# Altium PCB LM-CT-001.PcbDoc
Units mm, origin at the board's own origin, x right, y up, seen from the top; angles counter-clockwise.
Board outline 15 x 52.8 mm, 5 copper layers (Top Layer, Guard, Signal Layer 1, GND, Bottom Layer), stack 0.941 mm thick; 72 components, 73 nets, 279 pads, 38 vias.
Unrouted connection lines stored in the file: 122.
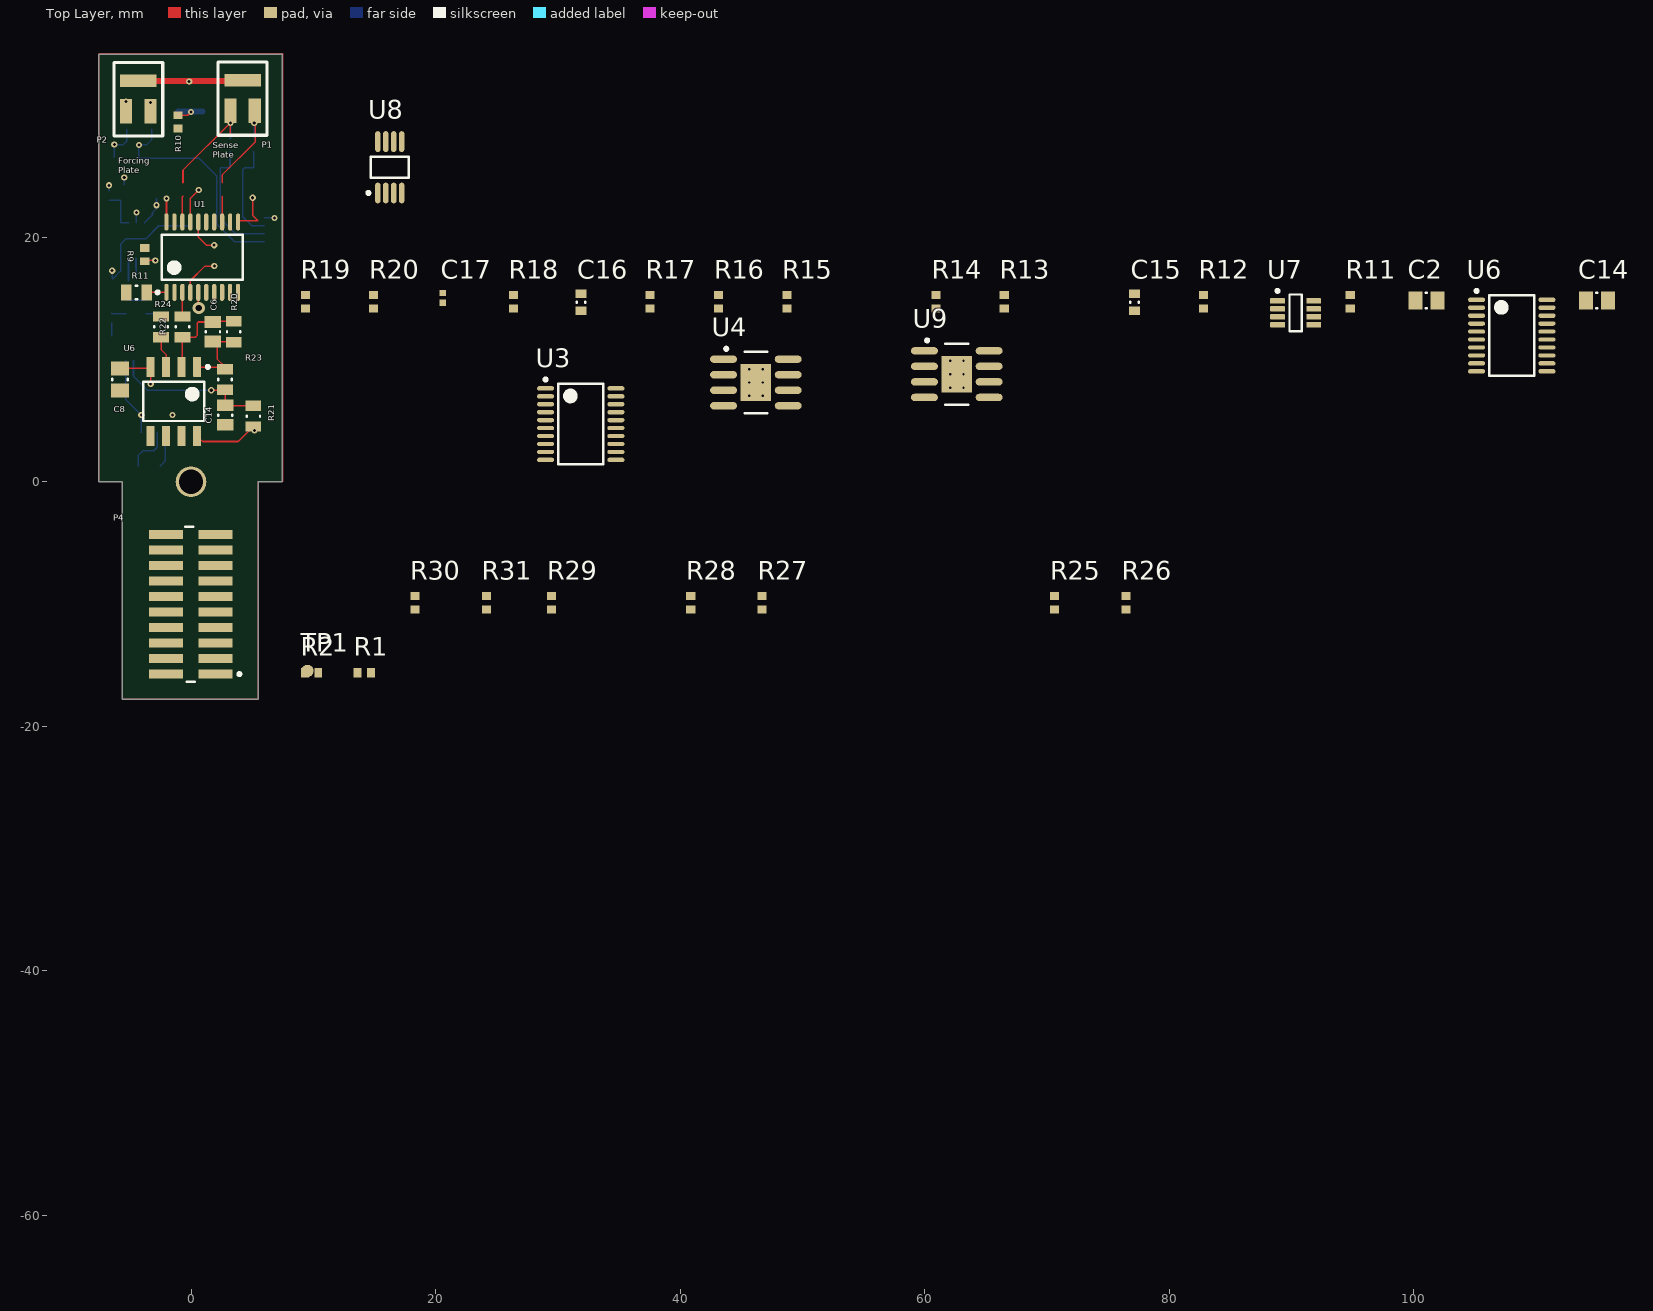
[diagram p0: Top Layer view]
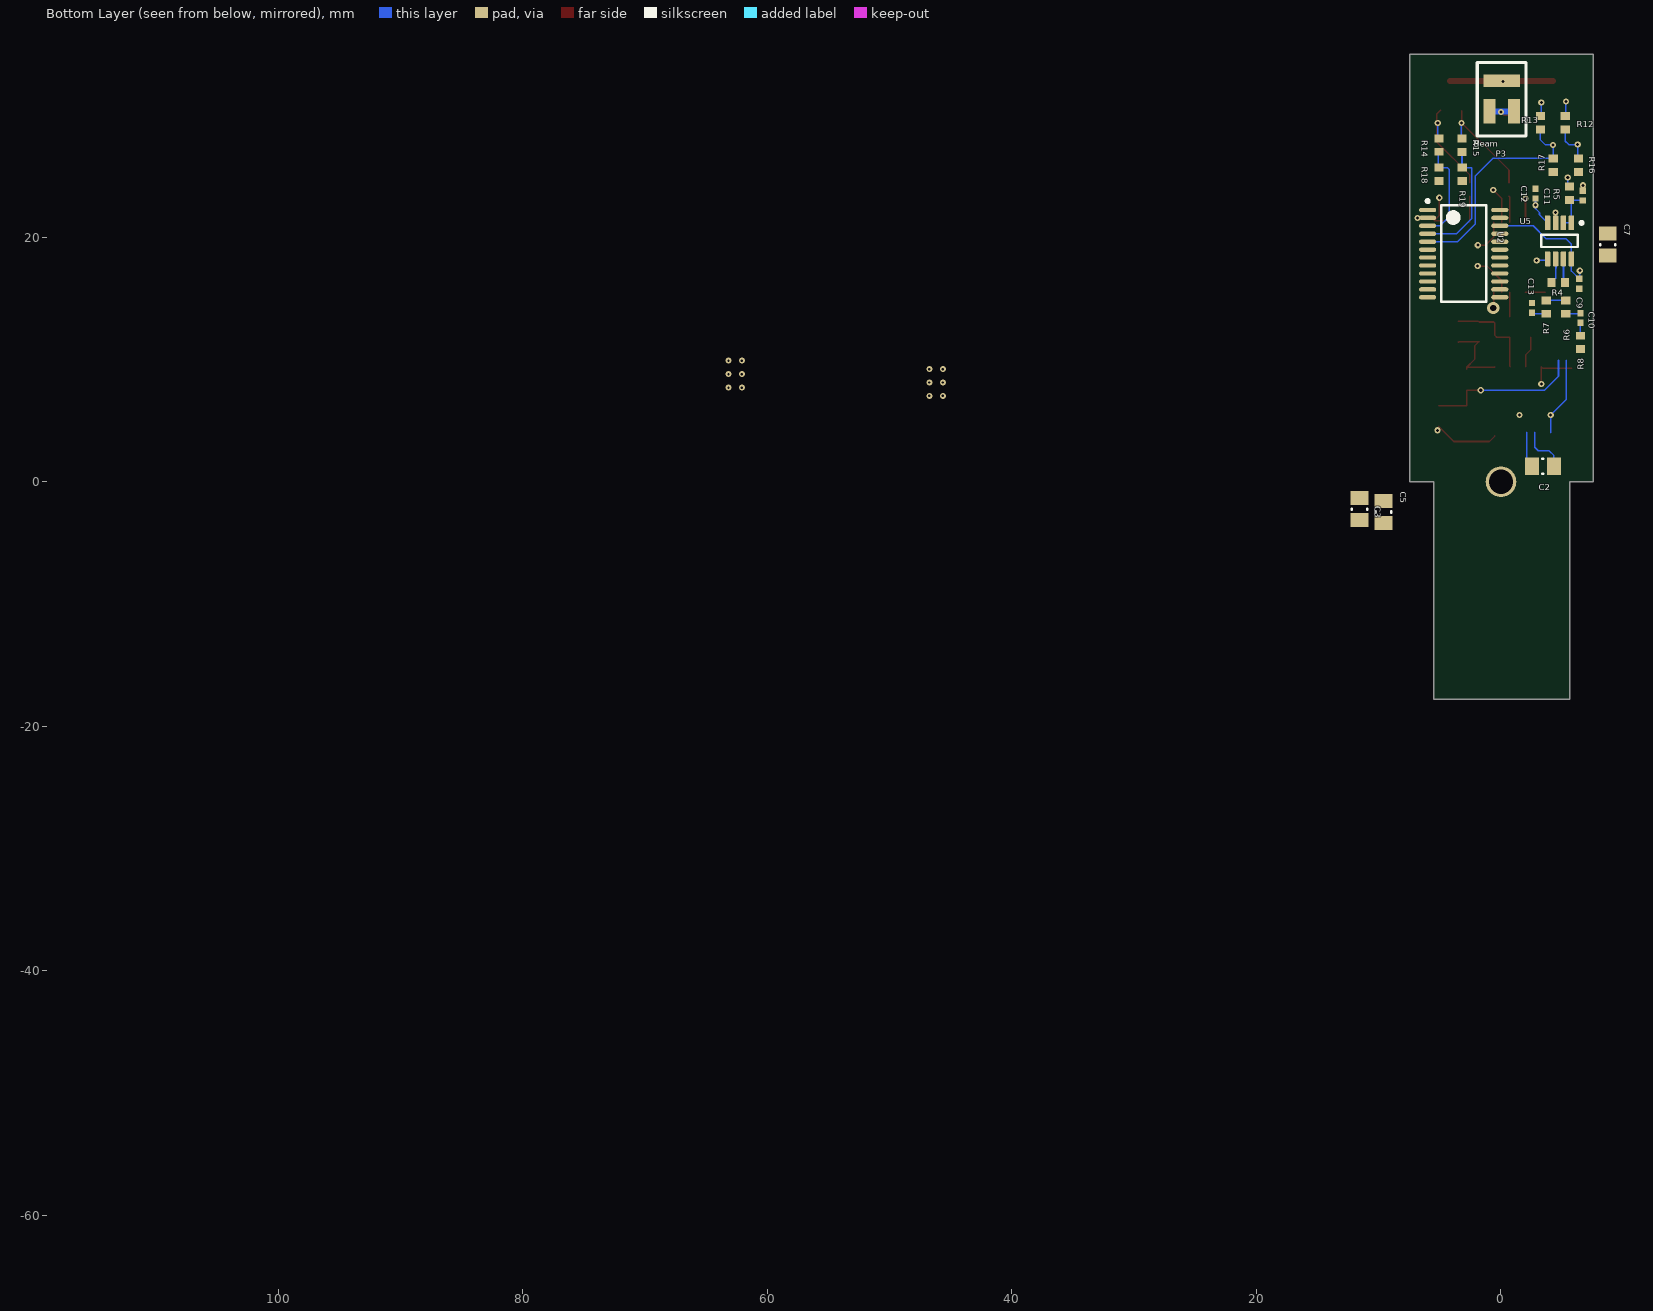
[diagram p1: Bottom Layer view, seen from below]
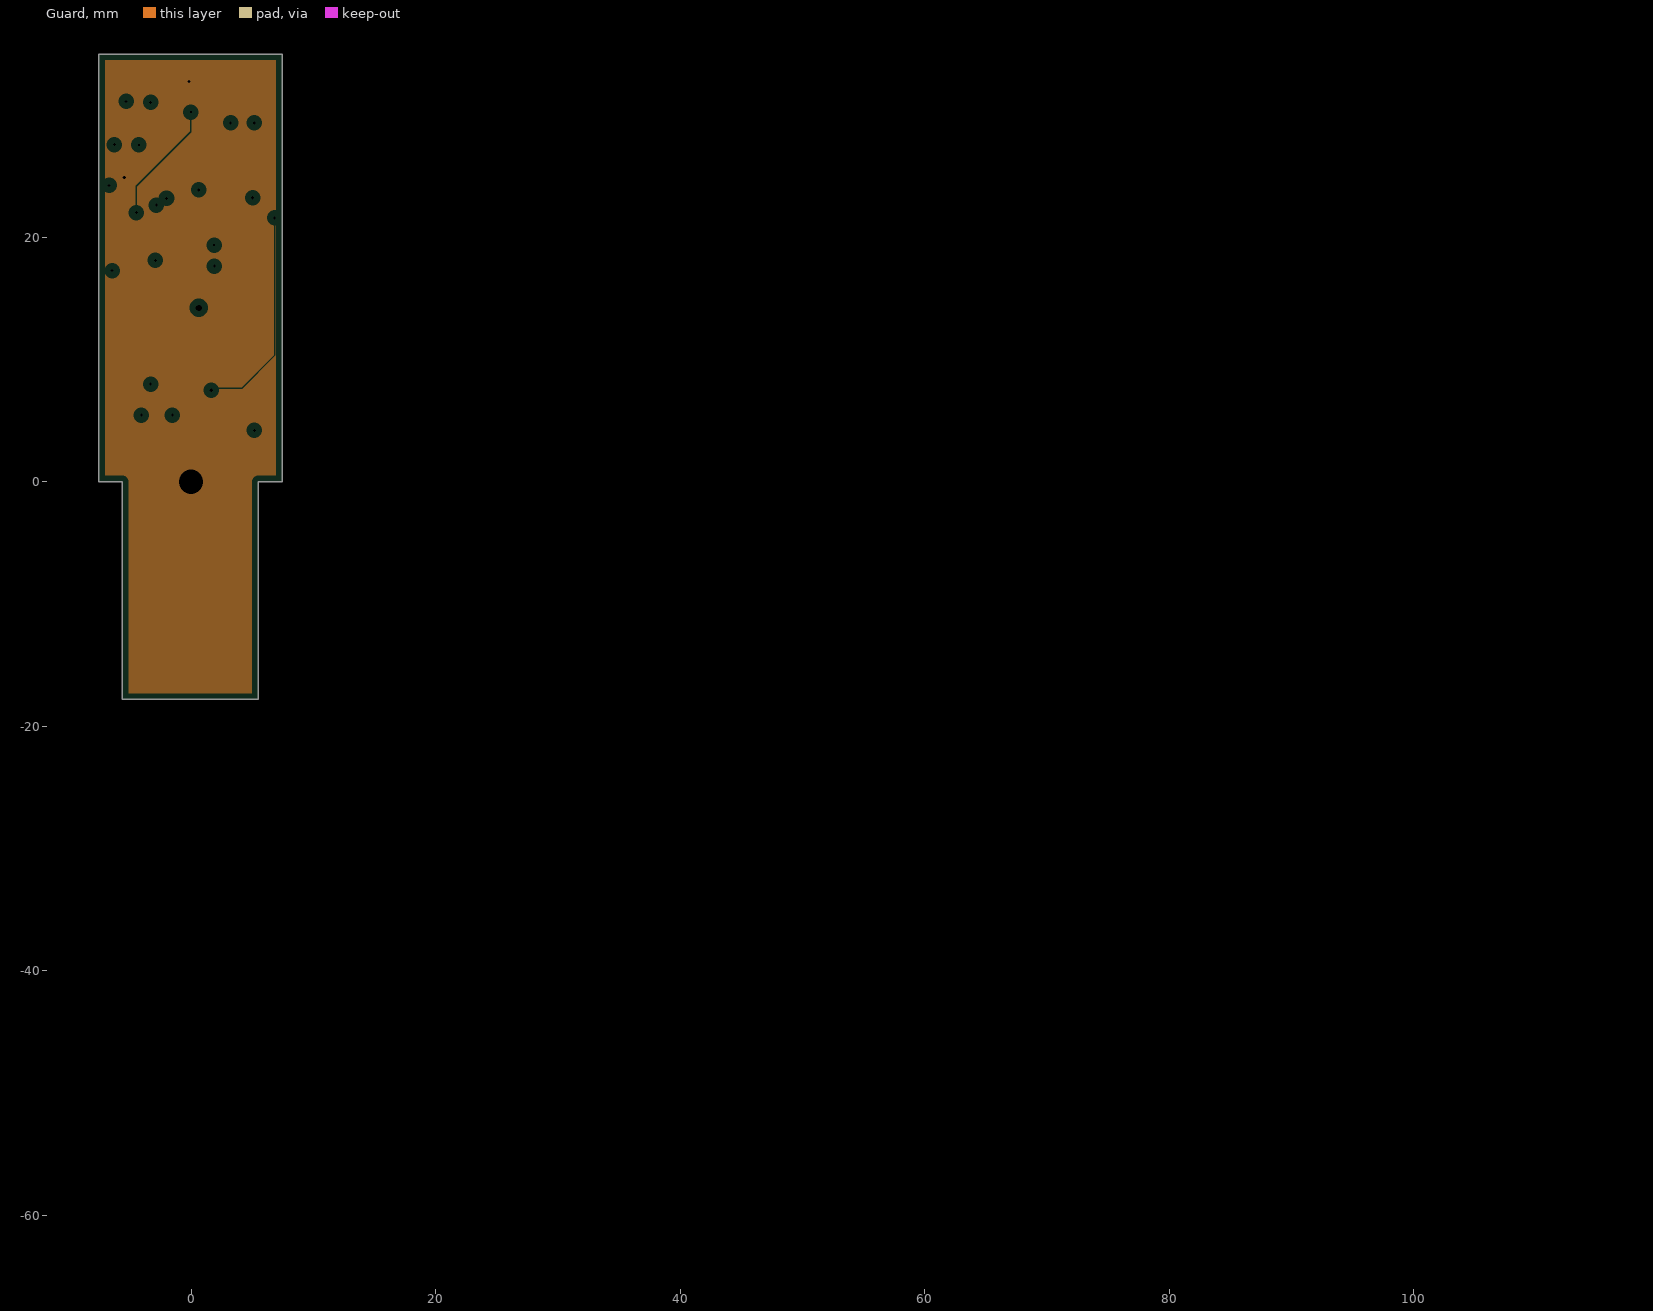
[diagram p2: Guard, clearances drawn from the general rule]
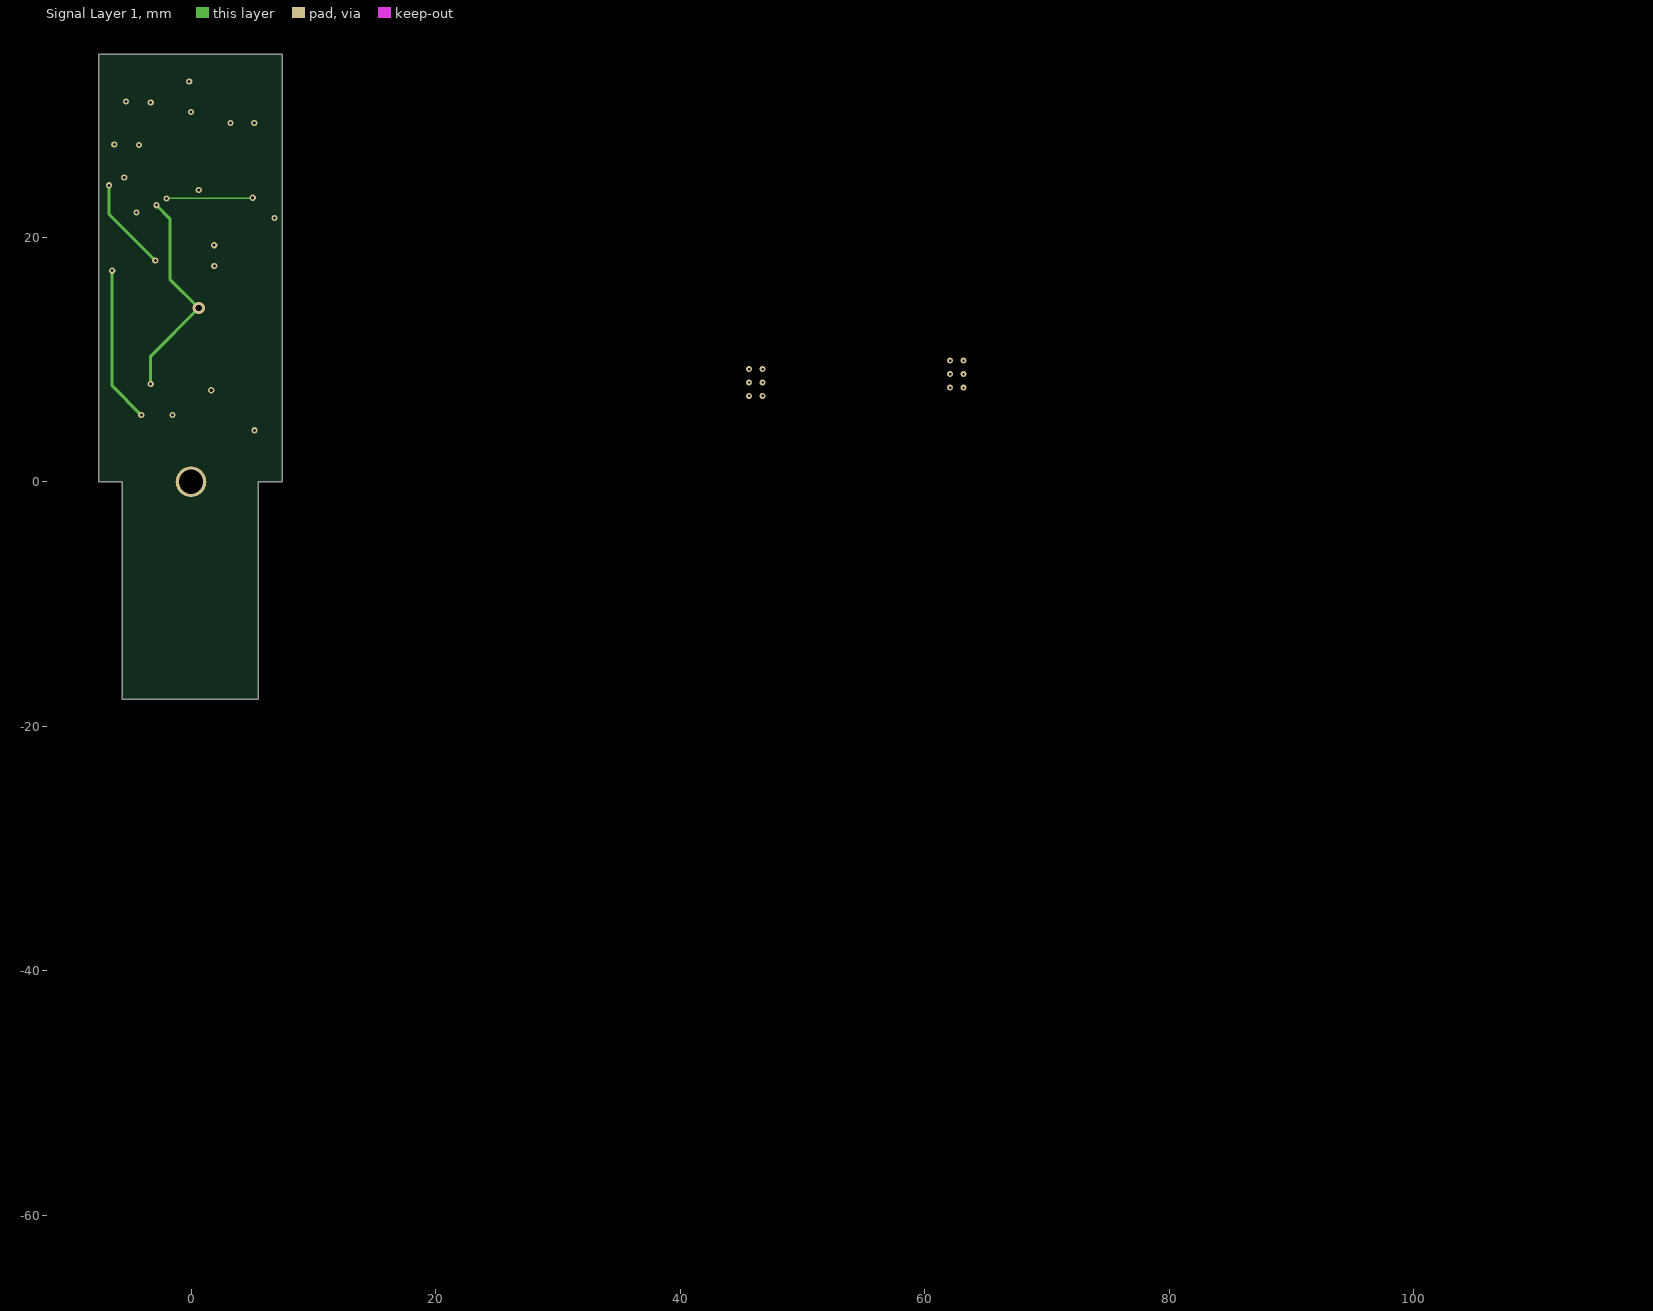
[diagram p3: Signal Layer 1]
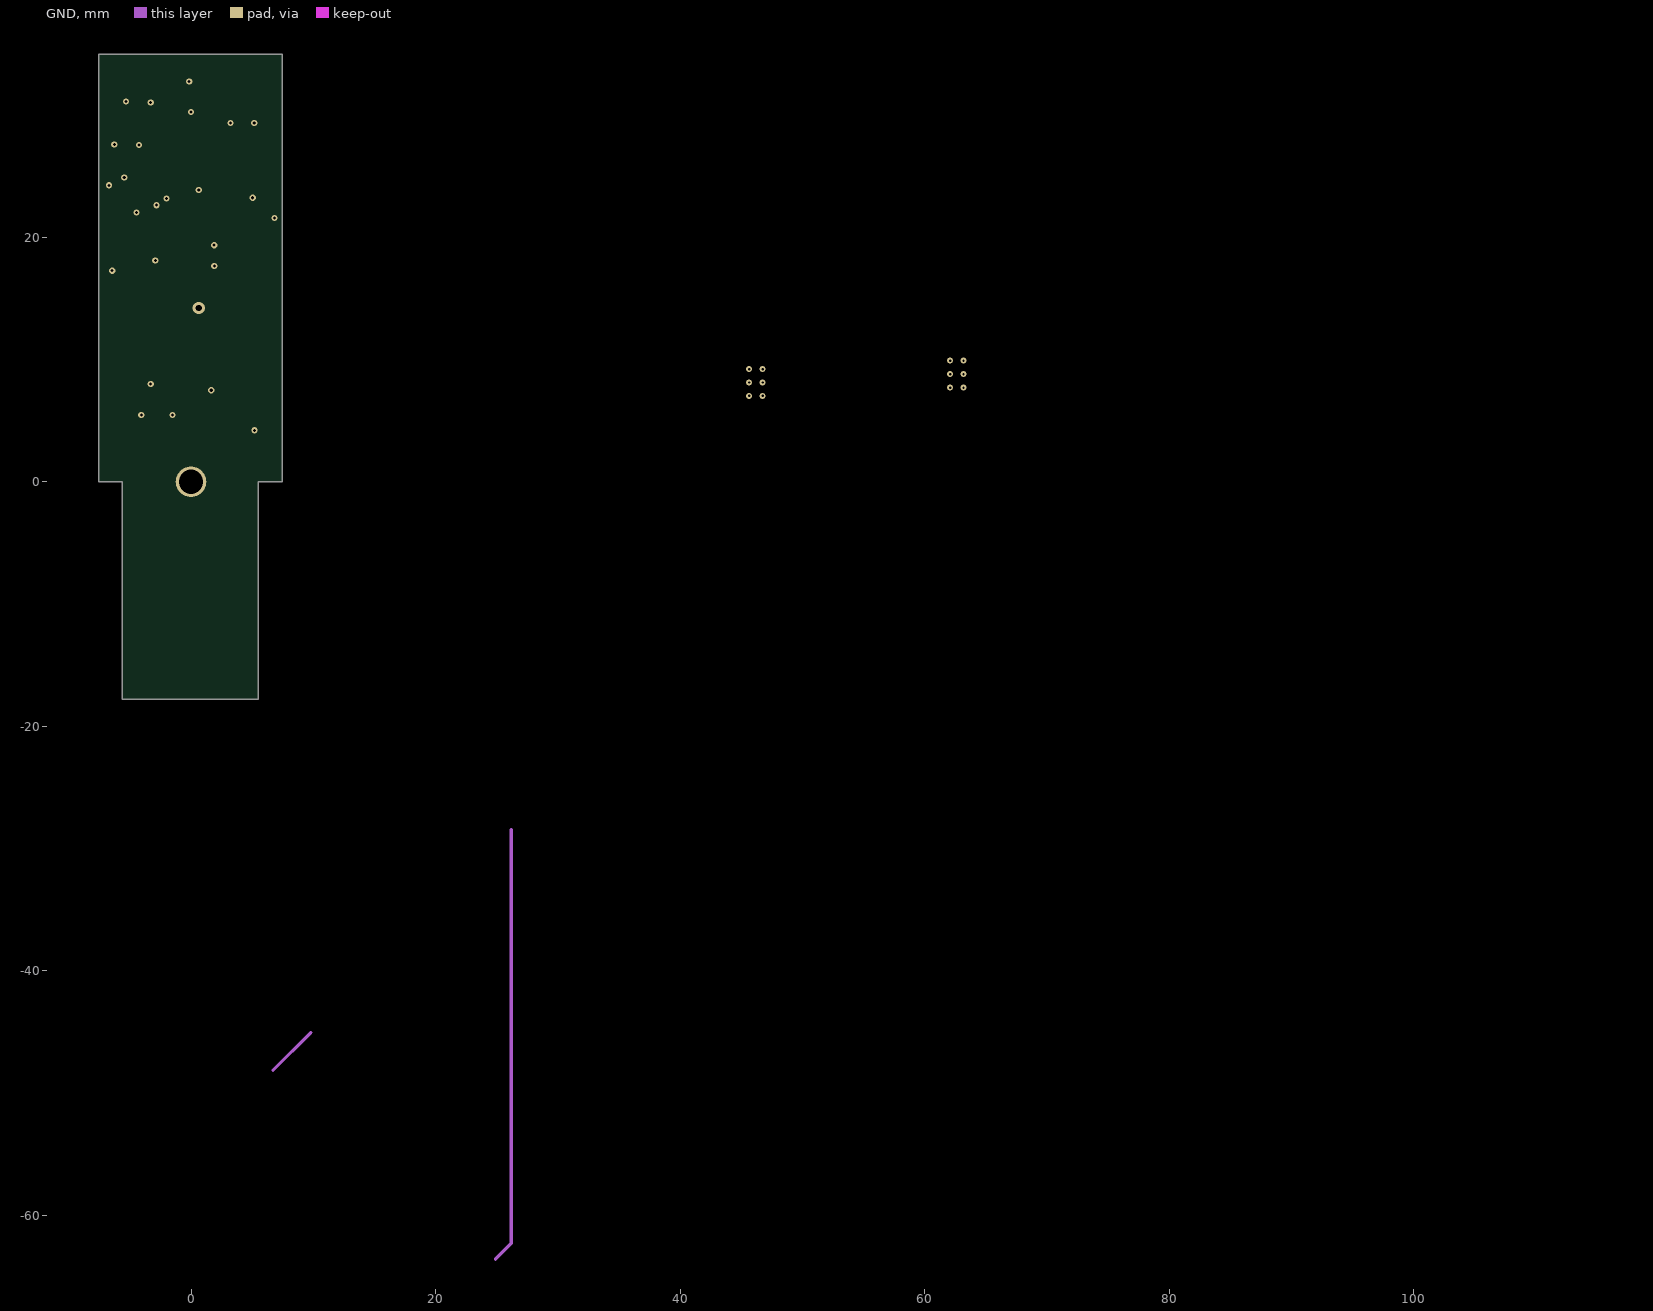
[diagram p4: GND]

## Layer stack, top to bottom
Top Solder: solder mask 0.0102, Solder Resist, Dk 3.5
Top Layer: signal copper 0.0356
Dielectric 1: core 0.254, FR-4, Dk 4.2
Guard: plane copper 0.036, net Guard
Dielectric 4: prepreg 0.127, Dk 4.2
Signal Layer 1: signal copper 0.036
Dielectric 3: core 0.254, Dk 4.2
GND: signal copper 0.036
Dielectric 2: prepreg 0.127, Dk 4.2
Bottom Layer: signal copper 0.0356
Bottom Solder: solder mask 0.0102, Solder Resist, Dk 3.5

## Board outline
7.444,0.001 5.494,0.001 5.494,-17.8 -5.606,-17.8 -5.606,0.001 -7.556,0.001 -7.556,34.996 7.444,34.996

## Design rules (kind name [scope] priority, off if disabled: settings)
Clearance [All] p1: gap=0.127 ignorepadtopadclearanceinfootprint=FALSE except(0: Arc-Hole Track-Hole SMDPad-Hole THPad-Hole Via-Hole Fill-Hole Poly-Hole Region-Hole Text-Hole)
HoleToHoleClearance [All] p1: gap=0.127 allowstackedmicrovias=TRUE
MinimumSolderMaskSliver [All] p1: minsoldermaskwidth=0.127
PlaneClearance [All] p1: clearance=0.508
PlaneConnect [All] p1: planeconnectstyle=Relief reliefexpansion=0.508 reliefentries=4 reliefconductorwidth=0.254 reliefairgap=0.254
PolygonConnect [All] p1: connectstyle=Relief reliefconductorwidth=0.254 reliefentries=4 polygonreliefangle="90 Angle" airgapwidth=0.254
RoutingVias [All] p1: holewidth=0.254 width=0.508 viastyle="Through Hole" minholewidth=0.127 minwidth=0.254 maxholewidth=0.711 maxwidth=1.27
SilkToSolderMaskClearance [IsPad] p1: minsilkscreentomaskgap=0.127 clearancetoexposedcopper=TRUE
SolderMaskExpansion [All] p1: expansion=0.102
Width [All] p1: maxlimit=0.5 minlimit=0.127 preferedwidth=0.254 toplayer_prefwidth=0.127 midlayer2_maxwidth=0.254 bottomlayer_prefwidth=0.127 minimp=50.000000 maximp=50.000000 favimp=50.000000
25 further rules are at their usual default settings.

## Classes and differential pairs
component class Sense: C2 C14 C15 C16 C17 P2 R1 R2 R11 R12 R13 R14 R15 R16 R17 R18 R19 R20 U6 U7 U8
component class Force: P1 R25 R26 R27 R28 R29 R30 R31 U3 U4 U9
component class Beam_Amp: C9 C10 C11 C12 C13 P3 P4 R4 R5 R6 R7 R8 R9 R10 R11 TP1 U1 U5
component class ADC: C2 C3 C5 R12 R13 R14 R15 R16 R17 R18 R19 U2
component class Synch_Demod: C6 C7 C8 C14 R20 R21 R22 R23 R24 U6

## Components (designator, comment, footprint, x,y, rotation, side; value= is the part's Value field where it differs from the comment)
C2 "CAP CER 0.1UF 25V X7R 0805" CAPC0805(2012)145_N 101.045,14.839 r0 top
C2 "CAP CER 0.1UF 25V X7R 0805" CAPC0805(2012)145_N -3.429,1.27 r180 bottom
C3 "CAP CER 0.1UF 25V X7R 0805" CAPC0805(2012)145_N 11.582,-2.235 r270 bottom
C5 "CAP CER 0.1UF 25V X7R 0805" CAPC0805(2012)145_N 9.601,-2.464 r270 bottom
C6 "470nF" CAPC0805(2012)75_L 1.794,12.276 r270 top
C7 "CAP CER 0.1UF 25V X7R 0805" CAPC0805(2012)145_N -8.738,19.406 r270 bottom
C8 "CAP CER 0.1UF 25V X7R 0805" CAPC0805(2012)145_N -5.806,8.376 r270 top
C9 "0.1uF" CAPC0402(1005)60_L -6.4,16.2 r90 bottom
C10 "0.1uF" CAPC0402(1005)60_L -6.5,13.4 r270 bottom
C11 "0.1uF" CAPC0402(1005)60_L -6.68,23.419 r90 bottom
C12 "0.1uF" CAPC0402(1005)60_L -2.825,23.575 r270 bottom
C13 "1uF" CAPC0402(1005)60_L -2.54,14.224 r270 bottom
C14 "CAP CER 0.1UF 25V X7R 0805" CAPC0805(2012)145_N 114.99,14.839 r0 top
C14 "22uF" CAPC0805(2012)75_L 2.794,5.461 r90 top
C15 "1uF" CAPC0603(1608)100_L 77.169,14.686 r90 top
C16 "1uF" CAPC0603(1608)100_L 31.906,14.686 r90 top
C17 "0.1uF" CAPC0402(1005)60_L 20.578,15.042 r90 top
P1 "Triax_Conn" Triax_Conn 3.219,30.351 r0 top
P2 "Triax_Conn" Triax_Conn -5.309,30.302 r0 top
P3 "Triax_Conn" Triax_Conn 0.944,30.301 r180 bottom
P4 "FTSH-110-01-L-DV" SMTC-FTSH-110-01-L-DV_V -0.025,-10.008 r90 top
R1 "100" RESC0402(1005)_M 14.177,-15.616 r0 top
R2 "100" RESC0402(1005)_M 9.859,-15.616 r0 top
R4 "" RESC0402(1005)_M -4.7,16.3 r0 bottom
R5 "100" RESC0402(1005)_M -5.613,23.597 r90 bottom
R6 "" RESC0402(1005)_M -5.3,14.3 r90 bottom
R7 "" RESC0402(1005)_M -3.708,14.3 r270 bottom
R8 "" RESC0402(1005)_M -6.5,11.4 r270 bottom
R9 "" RESC0402(1005)_M -3.785,18.593 r90 top
R10 "2.2M" RESC0402(1005)_M -1.067,29.439 r90 top
R11 "3.9K" RESC0402(1005)_M 94.822,14.737 r90 top
R11 "0" RESC0805(2012)_L -4.456,15.501 r0 top
R12 "7.5K" RESC0402(1005)_M 82.808,14.737 r90 top
R12 "100K" RESC0402(1005)_M -5.258,29.388 r90 bottom
R13 "0" RESC0402(1005)_M 66.527,14.737 r90 top
R13 "100K" RESC0402(1005)_M -3.226,29.388 r90 bottom
R14 "DNP" RESC0402(1005)_M 60.939,14.737 r90 top
R14 "100K" RESC0402(1005)_M 5.075,27.55 r90 bottom
R15 "7.5K" RESC0402(1005)_M 48.747,14.737 r90 top
R15 "100K" RESC0402(1005)_M 3.189,27.534 r90 bottom
R16 "DNP" RESC0402(1005)_M 43.159,14.737 r90 top
R16 "10K" RESC0402(1005)_M -6.35,25.908 r90 bottom
R17 "3.9K" RESC0402(1005)_M 37.545,14.737 r90 top
R17 "10K" RESC0402(1005)_M -4.27,25.908 r90 bottom
R18 "0" RESC0402(1005)_M 26.369,14.737 r90 top
R18 "10K" RESC0402(1005)_M 5.075,25.146 r90 bottom
R19 "1M" RESC0402(1005)_M 9.351,14.737 r90 top
R19 "10K" RESC0402(1005)_M 3.172,25.146 r90 bottom
R20 "1M" RESC0402(1005)_M 14.939,14.737 r90 top
R20 "300K" RESC0805(2012)_L 3.494,12.276 r90 top
R21 "499K" RESC0805(2012)_L 5.094,5.376 r270 top
R22 "18.2K" RESC0805(2012)_L -0.706,12.676 r90 top
R23 "249K" RESC0805(2012)_L 2.794,8.376 r90 top
R24 "33K" RESC0805(2012)_L -2.45,12.675 r270 top
R25 "10k" RESC0402(1005)_M 70.641,-9.901 r90 top
R26 "100k" RESC0402(1005)_M 76.483,-9.901 r90 top
R27 "100k" RESC0402(1005)_M 46.715,-9.901 r90 top
R28 "100k" RESC0402(1005)_M 40.873,-9.901 r90 top
R29 "3.9K" RESC0402(1005)_M 29.493,-9.901 r90 top
R30 "10k" RESC0402(1005)_M 18.317,-9.901 r90 top
R31 "100k" RESC0402(1005)_M 24.159,-9.901 r90 top
TP1 "TP-SM-C-100" TP-SM-C-100 9.529,-15.463 r0 top
U1 "MAX333CWP+" TSOP65P640X90-20N 0.919,18.376 r90 top
U2 "MAX1300" MAX1300 3.048,18.669 r180 bottom
U3 "MAX333AEUP+" TSOP65P640X90-20N 31.877,4.724 r0 top
U4 "OPA454AIDDAG4" TI-DDA8-2745X2245TP_N 46.203,8.128 r0 top
U5 "OPA2378AIDCNT" DCN0008A_M -4.787,19.71 r270 bottom
U6 "MAX333CWP+" TSOP65P640X90-20N 108.03,11.969 r0 top
U6 "LPC662AIM" D0008A_M -1.406,6.576 r270 top
U7 "OPA2378AIDCNT" DCN0008A_M 90.352,13.823 r0 top
U8 "MCP4161-502E/MS" MSOP-MS8_N 16.256,25.73 r90 top
U9 "OPA454AIDDAG4" TI-DDA8-2745X2245TP_N 62.636,8.814 r0 top

## Footprints (in the part's own frame and the unit in brackets; to place one, negate y for a bottom-side part, rotate by r counter-clockwise, add the part's x,y. Pads: shape width x height; smd on the part's side, far side on the other; paste and mask are expansions set on the pad)
CAPC0402(1005)60_L [mm] "Chip Capacitor, Body 1.0x0.5mm, Height 0.6mm, IPC High Density"
  rect 0.52x0.52 smd: 1(-0.4,0) 2(0.4,0)
  body extent -0.55,-0.3 0.55,0.3, height 0.6
CAPC0603(1608)100_L [mm] "Chip Capacitor, Body 1.6x0.8mm, Height 1.0mm, IPC High Density"
  rect 0.7x0.9 smd: 1(-0.7,0) 2(0.7,0)
  silkscreen extent -0.05,-0.35 0.05,0.35, body extent -0.87,-0.47 0.88,0.48, height 1
CAPC0805(2012)75_L [mm] "Chip Capacitor, Body 2.0x1.2mm, Height 0.75mm, IPC High Density"
  rect 0.95x1.35 smd: 1(-0.8,0) 2(0.8,0)
  silkscreen extent -0.05,-0.58 0.05,0.58, body extent -1.1,-0.72 1.1,0.72, height 0.75
CAPC0805(2012)145_N [mm] "Chip Capacitor, Body 2.0x1.2mm, Height 1.45mm, IPC Medium Density"
  rect 1.15x1.45 smd: 1(-0.9,0) 2(0.9,0)
  silkscreen extent -0.05,-0.62 0.05,0.63, body extent -1.1,-0.72 1.1,0.73, height 1.45
D0008A_M [mm] "SOIC, 8-Leads, Body 5x4mm, Pitch 1.27mm, IPC Low Density"
  rrect15% 1.65x0.65 smd: 1(-2.825,1.905) 2(-2.825,0.635) 3(-2.825,-0.635) 4(-2.825,-1.905) 5(2.825,-1.905) 6(2.825,-0.635) 7(2.825,0.635) 8(2.825,1.905)
  silkscreen extent -2.95,-2.5 1.6,2.91, body extent -3,-2.45 3,2.45, height 1.63
DCN0008A_M [mm] "SOT23, 8-Leads, Body 3x1.75mm, Pitch 0.65mm, IPC Low Density"
  rrect22% 1.2x0.45 smd: 1(-1.475,0.975) 2(-1.475,0.325) 3(-1.475,-0.325) 4(-1.475,-0.975) 5(1.475,-0.975) 6(1.475,-0.325) 7(1.475,0.325) 8(1.475,0.975)
  silkscreen extent -1.6,-1.5 0.5,1.92, body extent -0.88,-1.5 0.87,1.5, height 1.45
MAX1300 [mm] "TSOP, 24-Leads, Body 7.80x4.40mm, Pitch 0.65mm, IPC Medium Density"
  oval 1.4x0.35 smd: 1(-2.95,3.575) 2(-2.95,2.925) 3(-2.95,2.275) 4(-2.95,1.625) 5(-2.95,0.975) 6(-2.95,0.325) 7(-2.95,-0.325) 8(-2.95,-0.975) 9(-2.95,-1.625) 10(-2.95,-2.275) 11(-2.95,-2.925) 12(-2.95,-3.575) 13(2.95,-3.575) 14(2.95,-2.925) 15(2.95,-2.275) 16(2.95,-1.625) 17(2.95,-0.975) 18(2.95,-0.325) 19(2.95,0.325) 20(2.95,0.975) 21(2.95,1.625) 22(2.95,2.275) 23(2.95,2.925) 24(2.95,3.575)
  silkscreen extent -3.08,-3.95 1.85,4.42, body extent -3.2,-3.95 3.2,3.95, height 1.1
MSOP-MS8_N [mm] "TSOP, 8-Leads, Body 3x3mm, Pitch 0.65mm, IPC Medium Density"
  oval 1.7x0.45 smd: 1(-2.1,0.975) 2(-2.1,0.325) 3(-2.1,-0.325) 4(-2.1,-0.975) 5(2.1,-0.975) 6(2.1,-0.325) 7(2.1,0.325) 8(2.1,0.975)
  silkscreen extent -2.22,-1.55 0.85,1.87, body extent -1.55,-1.55 1.55,1.55, height 1.1
RESC0402(1005)_M [mm] "Chip Resistor, Body 1.0x0.5mm, IPC Low Density"
  rect 0.65x0.75 smd: 1(-0.55,0) 2(0.55,0)
  body extent -0.52,-0.28 0.53,0.28, height 0.4
RESC0805(2012)_L [mm] "Chip Resistor, Body 2.0x1.3mm, IPC High Density"
  rect 0.85x1.3 smd: 1(-0.85,0) 2(0.85,0)
  silkscreen extent -0.05,-0.55 0.05,0.55, body extent -1.1,-0.67 1.1,0.68, height 0.7
SMTC-FTSH-110-01-L-DV_V [mm] "CONN, 20-Leads, Body 12.7x3.43mm, Pitch 1.27mm"
  rect 0.74x2.79 smd: 1(-5.715,-2.035) 2(-5.715,2.035) 3(-4.445,-2.035) 4(-4.445,2.035) 5(-3.175,-2.035) 6(-3.175,2.035) 7(-1.905,-2.035) 8(-1.905,2.035) 9(-0.635,-2.035) 10(-0.635,2.035) 11(0.635,-2.035) 12(0.635,2.035) 13(1.905,-2.035) 14(1.905,2.035) 15(3.175,-2.035) 16(3.175,2.035) 17(4.445,-2.035) 18(4.445,2.035) 19(5.715,-2.035) 20(5.715,2.035)
  silkscreen extent -6.35,-4.11 6.35,0.47, body extent -6.35,-2.92 6.35,2.92, height 5.97
TI-DDA8-2745X2245TP_N [mm] "SOP, 8-Leads, Body 4.9x3.9mm, Pitch 1.27mm, Thermal Pad 2.745x2.245mm, IPC Medium Density"
  oval 2.2x0.6 smd: 1(-2.645,1.905) 2(-2.645,0.635) 3(-2.645,-0.635) 4(-2.645,-1.905) 5(2.645,-1.905) 6(2.645,-0.635) 7(2.645,0.635) 8(2.645,1.905)
  rect 2.49x3 smd: 9(0,0)
  silkscreen extent -2.55,-2.5 0.93,2.88, body extent -2,-2.5 2,2.5, height 1.7
TP-SM-C-100 [mm] "Test Point, Surface Mounting, Circular, Pad Diameter 1mm"
  round 1 smd: 1(0,0)
Triax_Conn [mm] "Triaxial pads for Conning Tower"
  rect 1x2 smd: 1(0,0) 2(2,0)
  rect 3x1 smd: 3(1,2.5)
  silkscreen extent -1,-2 3,4
TSOP65P640X90-20N [mm] "TSOP, 20-Leads, Body 6.50x4.40mm, Pitch 0.65mm, IPC Medium Density"
  oval 1.4x0.35 smd: 1(-2.875,2.925) 2(-2.875,2.275) 3(-2.875,1.625) 4(-2.875,0.975) 5(-2.875,0.325) 6(-2.875,-0.325) 7(-2.875,-0.975) 8(-2.875,-1.625) 9(-2.875,-2.275) 10(-2.875,-2.925) 11(2.875,-2.925) 12(2.875,-2.275) 13(2.875,-1.625) 14(2.875,-0.975) 15(2.875,-0.325) 16(2.875,0.325) 17(2.875,0.975) 18(2.875,1.625) 19(2.875,2.275) 20(2.875,2.925)
  silkscreen extent -3,-3.3 1.85,3.77, body extent -2.25,-3.3 2.25,3.3, height 0.9

## Part data
C2 C3 C5 C7 C8 C14: library part CMP-1036-04795-1, Capacitance=0.1µF, Manufacturer="Murata Electronics North America", Manufacturer Part Number=GRM21BR71E104KA01L, Operating Temperature="-55°C ~ 125°C", Package / Case="0805 (2012 Metric)", Ratings=-, Supplier Part Number 1=490-1673-6-ND, Temperature Coefficient=X7R, Tolerance=±10%, Voltage - Rated=25V, Applications="General Purpose", Category=Capacitors, ComponentLink1Description=http://www.murata.com/~/media/webrenewal/support/library/catalog/products/capacitor/mlcc/c02e.ashx, ComponentLink1URL=http://www.murata.com/~/media/webrenewal/support/library/catalog/products/capacitor/mlcc/c02e.ashx, Features=-, Height - Seated (Max)=-, Lead Spacing=-, Lead Style=-, Mounting Type="Surface Mount, MLCC", Packaging=Digi-Reel®, Part Status=Active, Pricing 1="1=0.2, 10=0.145, 100=0.0683, 500=0.04788, 1000=0.03964 (USD)", RoHS="RoHS Compliant", Size / Dimension="0.079\" L x 0.049\" W (2.00mm x 1.25mm)", Stock 1=891652, Supplier 1=Digi-Key, Thickness (Max)="0.053\" (1.35mm)"
C2: library part CMP-1036-04795-1, Capacitance=1µF, Manufacturer="Murata Electronics North America", Manufacturer Part Number=GRM21BR71E104KA01L, Operating Temperature="-55°C ~ 125°C", Package / Case="0805 (2012 Metric)", Ratings=-, Supplier Part Number 1=490-1673-6-ND, Temperature Coefficient=X7R, Tolerance=±10%, Voltage - Rated=25V, Applications="General Purpose", Category=Capacitors, ComponentLink1Description=http://www.murata.com/~/media/webrenewal/support/library/catalog/products/capacitor/mlcc/c02e.ashx, ComponentLink1URL=http://www.murata.com/~/media/webrenewal/support/library/catalog/products/capacitor/mlcc/c02e.ashx, Features=-, Height - Seated (Max)=-, Lead Spacing=-, Lead Style=-, Mounting Type="Surface Mount, MLCC", Packaging=Digi-Reel®, Part Status=Active, Pricing 1="1=0.2, 10=0.145, 100=0.0683, 500=0.04788, 1000=0.03964 (USD)", RoHS="RoHS Compliant", Size / Dimension="0.079\" L x 0.049\" W (2.00mm x 1.25mm)", Stock 1=891652, Supplier 1=Digi-Key, Thickness (Max)="0.053\" (1.35mm)"
C6: library part CMP-1036-02117-1, "CAP CER 0.47UF 25V X7R 0805", Manufacturer="Murata Electronics North America", Manufacturer Part Number=GRM219R71E474KA88D, Operating Temperature="-55°C ~ 125°C", Package / Case="0805 (2012 Metric)", Ratings=-, Supplier Part Number 1=490-11584-1-ND, Temperature Coefficient=X7R, Tolerance=±10%, Voltage - Rated=25V, Applications="General Purpose", Category=Capacitors, ComponentLink1Description=https://www.murata.com/~/media/webrenewal/support/library/catalog/products/capacitor/mlcc/c02e.ashx?la=en-us, ComponentLink1URL=https://www.murata.com/~/media/webrenewal/support/library/catalog/products/capacitor/mlcc/c02e.ashx?la=en-us, Features=-, Height - Seated (Max)=-, Lead Spacing=-, Lead Style=-, Mounting Type="Surface Mount, MLCC", Packaging="Cut Tape (CT)", Part Status=Active, Pricing 1="1=0.38, 10=0.262, 100=0.1573, 500=0.118, 1000=0.09964 (USD)", RoHS="RoHS Compliant", Size / Dimension="0.079\" L x 0.049\" W (2.00mm x 1.25mm)", Stock 1=410, Supplier 1=Digi-Key, Thickness (Max)="0.037\" (0.95mm)"
C9 C10 C11 C12 C13 C17: library part CMP-1034-00252-1, "CAP CER 0.1UF 10V X7R 0402", Manufacturer="Murata Electronics North America", Manufacturer Part Number=GRM155R71A104KA01D, Operating Temperature="-55°C ~ 125°C", Package / Case="0402 (1005 Metric)", Ratings=-, Supplier Part Number 1=490-6321-1-ND, Temperature Coefficient=X7R, Tolerance=±10%, Voltage - Rated=10V, Applications="General Purpose", Category=Capacitors, ComponentLink1Description=http://www.murata.com/~/media/webrenewal/support/library/catalog/products/capacitor/mlcc/c02e.ashx?la=en-us, ComponentLink1URL=http://www.murata.com/~/media/webrenewal/support/library/catalog/products/capacitor/mlcc/c02e.ashx?la=en-us, Features=-, Height - Seated (Max)=-, Lead Spacing=-, Mounting Type="Surface Mount, MLCC", Packaging="Cut Tape (CT)", Part Status=Active, Pricing 1="1=0.1, 10=0.014, 100=0.0063, 500=0.00446, 1000=0.00351, 2500=0.00319, 5000=0.00293 (USD)", RoHS="RoHS Compliant", Size / Dimension="0.039\" L x 0.020\" W (1.00mm x 0.50mm)", Stock 1=2920395, Supplier 1=Digi-Key, Thickness (Max)="0.022\" (0.55mm)"
C14: library part CMP-1036-02117-1, "CAP CER 22UF 25V X5R 0805", Manufacturer="Murata Electronics North America", Manufacturer Part Number=GRM21BR61E226ME44L, Operating Temperature="-55°C ~ 85°C", Package / Case="0805 (2012 Metric)", Ratings=-, Supplier Part Number 1=490-10749-1-ND, Temperature Coefficient=X5R, Tolerance=±20%, Voltage - Rated=25V, Applications="General Purpose", Category=Capacitors, ComponentLink1Description=http://search.murata.co.jp/Ceramy/image/img/A01X/G101/ENG/GRM21BR61E226ME44-01.pdf, ComponentLink1URL=http://search.murata.co.jp/Ceramy/image/img/A01X/G101/ENG/GRM21BR61E226ME44-01.pdf, Features=-, Height - Seated (Max)=-, Lead Spacing=-, Lead Style=-, Mounting Type="Surface Mount, MLCC", Notification="Current market demand for these product types have resulted in fluctuating and extending lead times. Lead times may differ.", Packaging="Cut Tape (CT)", Part Status=Active, Pricing 1="1=0.57, 10=0.404, 100=0.2663, 500=0.19722, 1000=0.16764 (USD)", RoHS="RoHS Compliant", Size / Dimension="0.079\" L x 0.049\" W (2.00mm x 1.25mm)", Stock 1=2004, Supplier 1=Digi-Key, Thickness (Max)="0.057\" (1.45mm)"
C15 C16: library part CMP-1035-00303-1, "CAP 4.3pF 25V ±0.5pF 0603 (1608 Metric) Thickness 1mm SMD", Manufacturer="Samsung Electro-Mechanics", Manufacturer Part Number=CL10B105KA8NNNC, Operating Temperature="-55°C ~ 125°C", Package / Case="0603 (1608 Metric)", Ratings=-, Supplier Part Number 1=1276-1184-1-ND, Temperature Coefficient=X7R, Tolerance=±10%, Voltage - Rated=25V, Applications="General Purpose", Category=Capacitors, ComponentLink1Description=http://media.digikey.com/pdf/Data%20Sheets/Samsung%20PDFs/CL_Series_MLCC_ds.pdf, ComponentLink1URL=http://media.digikey.com/pdf/Data%20Sheets/Samsung%20PDFs/CL_Series_MLCC_ds.pdf, Features=-, Height - Seated (Max)=-, Lead Spacing=-, Lead Style=-, Mounting Type="Surface Mount, MLCC", Notification="Current market demand for these product types have resulted in fluctuating and extending lead times. Lead times may differ.", Packaging="Cut Tape (CT)", Part Status=Active, Pricing 1="1=0.1, 10=0.061, 100=0.027, 500=0.01926, 1000=0.01513 (USD)", RoHS="RoHS Compliant", Size / Dimension="0.063\" L x 0.032\" W (1.60mm x 0.80mm)", Stock 1=1067488, Supplier 1=Digi-Key, Thickness (Max)="0.035\" (0.90mm)"
P4: library part CMP-2000-06294-2, "Male Header, Pitch 1.27 mm, 2 x 10 Position, Height 6.1 mm, -55 to 125 degC, RoHS, Tube", Color=Black, Manufacturer=Samtec, Package Description="Male Header, Pitch 1.27 mm, 2 x 10 Position, Height 6.1 mm", Standard Package=1, Catalog Drawings=FTSHSeriesFTSHSeriesSMTSide, Category=Connectors,Interconnects, Connector Type=Header,Unshrouded, Contact Finish=Gold, Contact Finish Thickness=10µin(0.25µm), Contact Type=MalePin, Datasheet URL=http://suddendocs.samtec.com/catalog_english/ftsh_smt.pdf, Datasheet Version="F-215 , 02/2016", EDA / CAD Models=DownloadfromAcceleratedDesigns, Family=RectangularConnectors-Headers,MalePins, Fastening Type=-, Featured Product=Board-To-BoardInterconnectSystems, Features=-, Manufacturer URL=http://www.samtec.com/, Mounting Technology=SurfaceMount, Mounting Type=SurfaceMount, Number of Positions=20, Number of Positions Loaded=All, Number of Rows=2, Online Catalog=FTSHSeries, Other Names=SAM1161-10, Package Reference=FTSH-110-01-L-DV, Package URL=http://suddendocs.samtec.com/prints/ftsh-1xx-xx-xxx-dv-xxx-xxx-mkt.pdf, Packaging=Bulk, Product Training Modules=Board-to-BoardConnectors, Series=FTSH, Termination=Solder
R1 R2 R4 R5 R6 R7 R8 R9 R10 R11 R12 R12 R13 R14 R15 R15 R16 R17 R17 R18 R19 R19 R20 R25 R26 R29 R30 R31: library part CMP-1011-00463-1
R11: library part CMP-1013-00215-1, "RES SMD 0 OHM JUMPER 1/8W 0805", Manufacturer="Panasonic Electronic Components", Manufacturer Part Number=ERJ-6GEY0R00V, Operating Temperature="-55°C ~ 155°C", Package / Case="0805 (2012 Metric)", Power (Watts)="0.125W, 1/8W", Supplier Device Package=0805, Supplier Part Number 1=P0.0ACT-ND, Temperature Coefficient=-, Tolerance=Jumper, Category=Resistors, ComponentLink1Description=http://industrial.panasonic.com/www-cgi/jvcr13pz.cgi?E+PZ+3+AOA0001+ERJ6GEY0R00V+7+WW, ComponentLink1URL=http://industrial.panasonic.com/www-cgi/jvcr13pz.cgi?E+PZ+3+AOA0001+ERJ6GEY0R00V+7+WW, Composition="Thick Film", Failure Rate=-, Features="Automotive AEC-Q200", Height - Seated (Max)="0.028\" (0.70mm)", Packaging="Cut Tape (CT)", Part Status=Active, Pricing 1="1=0.1, 10=0.074, 25=0.0532, 50=0.0406, 100=0.03, 250=0.02288, 500=0.0183, 1000=0.01347 (USD)", RoHS="RoHS Compliant", Size / Dimension="0.079\" L x 0.049\" W (2.00mm x 1.25mm)", Stock 1=3414819, Supplier 1=Digi-Key
R13 R14 R16 R18 R27 R28: library part CMP-1011-00651-1
R20: library part CMP-1013-00215-1, "RES SMD 300K OHM 1% 1/8W 0805", Manufacturer="Vishay Dale", Manufacturer Part Number=CRCW0805300KFKEAHP, Operating Temperature="-55°C ~ 155°C", Package / Case="0805 (2012 Metric)", Power (Watts)="0.5W, 1/2W", Supplier Device Package=0805, Supplier Part Number 1=541-300KTCT-ND, Temperature Coefficient=±100ppm/°C, Tolerance=±1%, Category=Resistors, ComponentLink1Description=http://www.vishay.com/docs/20043/crcwhpe3.pdf, ComponentLink1URL=http://www.vishay.com/docs/20043/crcwhpe3.pdf, Composition="Thick Film", Failure Rate=-, Features="Automotive AEC-Q200, Pulse Withstanding", Height - Seated (Max)="0.020\" (0.50mm)", Packaging="Cut Tape (CT)", Part Status=Active, Pricing 1="1=0.28, 10=0.233, 100=0.0911, 1000=0.03812, 2500=0.03494 (USD)", RoHS="RoHS Compliant", Size / Dimension="0.079\" L x 0.049\" W (2.00mm x 1.25mm)", Stock 1=3851, Supplier 1=Digi-Key
R21: library part CMP-1013-00215-1, "RES SMD 499K OHM 0.1% 1/8W 0805", Manufacturer="Panasonic Electronic Components", Manufacturer Part Number=ERA-6AEB4993V, Operating Temperature="-55°C ~ 155°C", Package / Case="0805 (2012 Metric)", Power (Watts)="0.125W, 1/8W", Supplier Device Package=0805, Supplier Part Number 1=P499KDACT-ND, Temperature Coefficient=±25ppm/°C, Tolerance=±0.1%, Category=Resistors, ComponentLink1Description=https://industrial.panasonic.com/cdbs/www-data/pdf/RDM0000/AOA0000C307.pdf, ComponentLink1URL=https://industrial.panasonic.com/cdbs/www-data/pdf/RDM0000/AOA0000C307.pdf, Composition="Thin Film", Failure Rate=-, Features="Automotive AEC-Q200", Height - Seated (Max)="0.024\" (0.60mm)", Packaging="Cut Tape (CT)", Part Status=Active, Pricing 1="1=0.36, 10=0.302, 100=0.1182, 1000=0.04948, 2500=0.04536 (USD)", RoHS="RoHS Compliant", Size / Dimension="0.079\" L x 0.049\" W (2.00mm x 1.25mm)", Stock 1=125602, Supplier 1=Digi-Key
R22: library part CMP-1013-00215-1, "RES SMD 18.2K OHM 1% 1/8W 0805", Manufacturer="Panasonic Electronic Components", Manufacturer Part Number=ERJ-6ENF1822V, Operating Temperature="-55°C ~ 155°C", Package / Case="0805 (2012 Metric)", Power (Watts)="0.125W, 1/8W", Supplier Device Package=0805, Supplier Part Number 1=P18.2KCCT-ND, Temperature Coefficient=±100ppm/°C, Tolerance=±1%, Category=Resistors, ComponentLink1Description=https://industrial.panasonic.com/cdbs/www-data/pdf/RDA0000/AOA0000C304.pdf, ComponentLink1URL=https://industrial.panasonic.com/cdbs/www-data/pdf/RDA0000/AOA0000C304.pdf, Composition="Thick Film", Failure Rate=-, Features="Automotive AEC-Q200", Height - Seated (Max)="0.028\" (0.70mm)", Packaging="Cut Tape (CT)", Part Status=Active, Pricing 1="1=0.1, 10=0.079, 100=0.0305, 1000=0.0134, 2500=0.01157 (USD)", RoHS="RoHS Compliant", Size / Dimension="0.079\" L x 0.049\" W (2.00mm x 1.25mm)", Stock 1=116820, Supplier 1=Digi-Key
R23: library part CMP-1013-00215-1, "RES SMD 249K OHM 0.1% 1/8W 0805", Manufacturer="Panasonic Electronic Components", Manufacturer Part Number=ERA-6AEB2493V, Operating Temperature="-55°C ~ 155°C", Package / Case="0805 (2012 Metric)", Power (Watts)="0.125W, 1/8W", Supplier Device Package=0805, Supplier Part Number 1=P249KDACT-ND, Temperature Coefficient=±25ppm/°C, Tolerance=±0.1%, Category=Resistors, ComponentLink1Description=https://industrial.panasonic.com/cdbs/www-data/pdf/RDM0000/AOA0000C307.pdf, ComponentLink1URL=https://industrial.panasonic.com/cdbs/www-data/pdf/RDM0000/AOA0000C307.pdf, Composition="Thin Film", Failure Rate=-, Features="Automotive AEC-Q200", Height - Seated (Max)="0.024\" (0.60mm)", Packaging="Cut Tape (CT)", Part Status=Active, Pricing 1="1=0.36, 10=0.302, 100=0.1182, 1000=0.04948, 2500=0.04536 (USD)", RoHS="RoHS Compliant", Size / Dimension="0.079\" L x 0.049\" W (2.00mm x 1.25mm)", Stock 1=18568, Supplier 1=Digi-Key
R24: library part CMP-1013-00215-1, "RES SMD 33K OHM 1% 1/2W 0805", Manufacturer="Vishay Dale", Manufacturer Part Number=CRCW080533K0FKEAHP, Operating Temperature="-55°C ~ 155°C", Package / Case="0805 (2012 Metric)", Power (Watts)="0.5W, 1/2W", Supplier Device Package=0805, Supplier Part Number 1=541-33.0KTCT-ND, Temperature Coefficient=±100ppm/°C, Tolerance=±1%, Category=Resistors, ComponentLink1Description=http://www.vishay.com/docs/20043/crcwhpe3.pdf, ComponentLink1URL=http://www.vishay.com/docs/20043/crcwhpe3.pdf, Composition="Thick Film", Failure Rate=-, Features="Automotive AEC-Q200, Pulse Withstanding", Height - Seated (Max)="0.020\" (0.50mm)", Packaging="Cut Tape (CT)", Part Status=Active, Pricing 1="1=0.28, 10=0.233, 100=0.0911, 1000=0.03812, 2500=0.03494 (USD)", RoHS="RoHS Compliant", Size / Dimension="0.079\" L x 0.049\" W (2.00mm x 1.25mm)", Stock 1=2026, Supplier 1=Digi-Key
TP1: library part CMP-0484-00002-2, "Test Point, Surface Mount, Circular, Pad Diameter 1 mm", Manufacturer="No Vendor", PartNumber=TP-SM-C-100
U1 U6: "IC SWITCH QUAD SPDT 20TSSOP", Case/Package=TSSOP, Dual Supply Voltage=15V, Manufacturer=Maxim, Manufacturer Part Number=MAX333AEUP+, Max Dual Supply Voltage=20V, Max Operating Temperature=85°C, Max Power Dissipation=559mW, Max Supply Current=250uA, Max Supply Voltage=30V, Min Dual Supply Voltage=4.5V, Min Operating Temperature=-40°C, Min Supply Voltage=10V, On-State Resistance=35R, Operating Supply Current=1uA, Package Quantity=74, Supplier Part Number 1=700-MAX333AEUP, ComponentLink1Description=https://datasheet.ciiva.com/2978/max333a-2978850.pdf, ComponentLink1URL=https://datasheet.ciiva.com/2978/max333a-2978850.pdf, ComponentLink2Description=https://datasheet.ciiva.com/30478/0900766b81253c85-30478260.pdf, ComponentLink2URL=https://datasheet.ciiva.com/30478/0900766b81253c85-30478260.pdf, ComponentLink3Description=https://datasheet.ciiva.com/1674/max333a-1674617.pdf, ComponentLink3URL=https://datasheet.ciiva.com/1674/max333a-1674617.pdf, ComponentLink4Description=https://datasheet.ciiva.com/26825/max333aeup-26825546.pdf, ComponentLink4URL=https://datasheet.ciiva.com/26825/max333aeup-26825546.pdf, Height=0.95mm, Lead Free="Lead Free", Length=6.6mm, Number of Bits=4, Number of Channels=4, Number of Pins=20, Packaging=Rail/Tube, Pricing 1="1=6.77, 10=6.43, 50=5.8, 100=5.8, 1000=5.62, 10000=5.62 (USD)", Radiation Hardening=No, REACH SVHC=Unknown, Stock 1=664, Supplier 1=Mouser, Supply Type=Single,Dual, Throw Configuration=SPDT, Turn-Off Delay Time=145ns, Turn-On Delay Time=175ns, Weight=0.006737oz, Width=4.5mm
U3: library part MAX333CWP+, "IC SWITCH QUAD SPDT 20TSSOP", Base Part Number=MAX333, Channel Capacitance (CS(off), CD(off))=5pF, Current - Leakage (IS(off)) (Max)=250pA, Manufacturer="Maxim Integrated", On-State Resistance (Max)="45 Ohm", Operating Temperature="-40°C ~ 85°C (TA)", Package / Case="20-TSSOP (0.173\", 4.40mm Width)", Supplier Device Package=20-TSSOP, Supplier Part Number 1=MAX333AEUP+-ND, Voltage - Supply, Dual (V±)="±4.5 V ~ 20 V", Voltage - Supply, Single (V+)="10 V ~ 30 V", -3db Bandwidth=-, Category="Integrated Circuits (ICs)", Channel-to-Channel Matching (&Delta;Ron)="2 Ohm (Max)", Charge Injection=2pC, ComponentLink1Description=https://pdfserv.maximintegrated.com/en/ds/MAX333A.pdf, ComponentLink1URL=https://pdfserv.maximintegrated.com/en/ds/MAX333A.pdf, Crosstalk="-78dB @ 1MHz", Manufacturer Part Number=MAX333AEUP+, Multiplexer/Demultiplexer Circuit=2:1, Packaging=Tube, Part Status=Active, Pricing 1="1=6.77, 10=6.432, 25=6, 50=5.8942 (USD)", RoHS="RoHS Compliant", Stock 1=1328, Supplier 1=Digi-Key, Switch Circuit=SPDT, Switch Time (Ton, Toff) (Max)="175ns, 145ns"
U4 U9: library part CMP-0017-00715-1, "High Voltage (100V), High-Current (50mA) Operational Amplifier, G=1 Stable, 10 to 100 V, -55 to 125 degC, 8-pin SOP (DDA8), Green (RoHS & no Sb/Br)", Manufacturer="Texas Instruments", Rating=Catalog, Total Supply Voltage(Max)(+5V is 5, +/-5V is 10)=100, Total Supply Voltage(Min)(+5V is 5, +/-5V is 10)=10, CMRR(Min)(dB)=100, Code_JEDEC=MS-012, ComponentLink1Description="Manufacturer URL", ComponentLink1URL=http://www.ti.com/, ComponentLink2Description=Datasheet, ComponentLink2URL=http://www.ti.com/lit/ds/symlink/opa454.pdf, ComponentLink3Description="Package Specification", ComponentLink3URL=http://www.ti.com/litv/pdf/mpds092e, DatasheetVersion=SBOS391A, Eco-Plan="Green (RoHS & no Sb/Br)", GBW(Typ)(MHz)=2.5, IIB(Max)(pA)=100, Iq per channel(Max)(mA)=4, Mounting Technology="Surface Mount", Number of Channels=1, Offset Drift(Typ)(uV/C)=1.6, PackageDescription="8-Pin PowerPAD(TM) Plastic Small Outline, Body 3.9 x 4.9 mm, Pitch 1.27 mm", PackageReference=DDA8-2745X2245TP, PackageVersion="4202561/F, 12/2011", PartNumber=OPA454AIDDAG4, Slew Rate(Typ)(V/us)=13, Sub Family="General Purpose Amplifier, High Output Current Amplifier (>=50mA), High Supply Voltage Amplifier (>=30V), Precision Amplifier", Vio (25C)(Max)(mV)=4, Vn at 1kHz(Typ)(nV/rtHz)=47
U5 U7: library part CMP-0272-01124-3, "Low-Noise, 900 kHz, RRIO, Precision Operational Amplifier, Zero-Drift Series, 2.2 to 5.5 V, -40 to 125 degC, 8-pin SOP (DCN8), Green (RoHS & no Sb/Br)", Manufacturer="Texas Instruments", Total Supply Voltage(Max)(+5V is 5, +/-5V is 10)=5.5, Total Supply Voltage(Min)(+5V is 5, +/-5V is 10)=2.2, CMRR(Min)(dB)=100, Code_JEDEC=MO-178, ComponentLink1Description="Manufacturer URL", ComponentLink1URL=http://www.ti.com/, ComponentLink2Description=Datasheet, ComponentLink2URL=http://www.ti.com/general/docs/lit/getliterature.tsp?genericPartNumber=OPA2378&fileType=pdf, ComponentLink3Description="Package Specification", ComponentLink3URL=http://www.ti.com/lit/ml/mpds099c/mpds099c.pdf, DatasheetVersion=SBOS417D, Eco-Plan="Green (RoHS & no Sb/Br)", IIB(Max)(pA)=550, Iq per channel(Max)(mA)=0.15, Mounting Technology="Surface Mount", Number of Channels=2, Offset Drift(Typ)(uV/C)=0.25, PackageDescription="8-Pin Plastic Small Outline, Body 1.6 x 2.9 mm, Pitch 0.65 mm", PackageReference=DCN0008A, PackageVersion="4202106/D, 11/2009", PartId=1, PartNumber=OPA2378AIDCNT, Slew Rate(Typ)(V/us)=0.4, Sub Family="Low Offset Voltage Amplifier (<=500uV), Low Power Amp (<=500uA), Low Supply Voltage Amplifier (<=2.7V), Precision Amplifier, Zero Drift Precision Amplifier", Vio (25C)(Max)(mV)=0.07, Vn at 1kHz(Typ)(nV/rtHz)=20
U6: library part CMP-0055-00867-3, "Low Power CMOS Dual Operational Amplifier, 8-pin Narrow SOIC", Base Part Number=LPC662, Current - Supply=86µA, Manufacturer="Texas Instruments", Manufacturer Part Number=LPC662AIM/NOPB, Operating Temperature="-40°C ~ 85°C", Package / Case="8-SOIC (0.154\", 3.90mm Width)", Supplier Device Package=8-SOIC, Supplier Part Number 1=LPC662AIM/NOPB-ND, Voltage - Supply, Single/Dual (±)="4.75 V ~ 15.5 V, ±2.38 V ~ 7.75 V", Amplifier Type="General Purpose", Category="Integrated Circuits (ICs)", ComponentLink1Description=http://www.ti.com/lit/ds/symlink/lpc662.pdf, ComponentLink1URL=http://www.ti.com/lit/ds/symlink/lpc662.pdf, Mounting Type="Surface Mount", Output Type=Rail-to-Rail, Packaging=Tube, Part Status=Active, Pricing 1="1=3.4, 95=2.88905, 190=2.50379, 570=2.13144, 1045=1.7976 (USD)", RoHS="RoHS Compliant", Slew Rate="0.11 V/µs", Stock 1=319, Supplier 1=Digi-Key
U8: library part CMP-0188-00907-2, "7/8-Bit Single/Dual SPI Digital POT with Non-Volatile Memory, 8-Pin MSOP, Extended Temperature", ComponentLink1Description="Manufacturer URL", ComponentLink1URL=http://www.microchip.com/, ComponentLink2Description=Datasheet, ComponentLink2URL=http://ww1.microchip.com/downloads/en/DeviceDoc/22059b.pdf, ComponentLink3Description="Package Specification", ComponentLink3URL=http://www.microchip.com/stellent/groups/techpub_sg/documents/packagingspec/en012702.pdf, DatasheetVersion="revB, Dec-2008", PackageDescription="8-Lead Plastic Micro Small Outline Package (MS) [MSOP]", PackageReference=MSOP-MS8, PackageVersion="revBB, Aug-2009", RevisionNote="URLs added."

## Free pads (board coordinates)
  round 2.5 hole 2: 3(0,0)

## Via types
v1: diameter 0.508, hole 0.254, Top Layer to Bottom Layer, 25 vias
v2: diameter 0.5, hole 0.2, Top Layer to Bottom Layer, 12 vias
v3: diameter 1, hole 0.5, Top Layer to Bottom Layer, 1 vias

## Nets (pads, with @x,y where several pads share a name; then routed paths per layer and width w, separated by ;. In a path a pad name is that pad's centre, name@x,y a point inside that pad or via, vN(x,y) a via of type N, cw(c..) or ccw(c..) an arc to the next point about the centre after c; other vN are vias at no path point)
+3.3: U2.17 U2.18
  other v1: -1.524,5.461
+5: C3.2 C5.2 C7.1 C9.2 P4.4 R21.2 U2.1 U2.22 U5.8 U6.8@0.499,3.751 U8.8 | length 34.8
  Top Layer w0.127: U6.8@0.499,3.751 0.949,3.302 3.87,3.302 R21.2
  Signal Layer 1 w0.254: v1(-6.45,17.272) -6.45,7.847 v1(-4.064,5.461)
  Bottom Layer w0.127: v1(-6.45,17.272) -6.45,16.65 C9.2 -5.762,17.238 U5.8 -5.762,19.435 -5.309,19.888 -3.686,19.888 -2.631,20.944 U2.22 ; -5.353,9.935 -5.353,6.75 v1(-4.064,5.461) -4.064,4.046 -4.053,4.035
  other v1: 5.182,4.216
+5R: U6.12 U6.17
+12: C14.2@115.89,14.839 C17.2 U3.16 U6.16 U7.8
-5: C2.1@100.145,14.839 C8.1 C12.2 P4.3 U1.5 U5.4 U6.4@-3.311,9.401 U6.5@105.155,12.294 | length 25.3
  Top Layer w0.127: C8.1 -3.436,9.276 -3.311,9.401 -3.311,8.01 v1(-3.302,8.001) ; v3@0.594,14.265 U1.5
  Signal Layer 1 w0.254: v1(-3.302,8.001) -3.302,10.287 v3(0.635,14.224) -1.727,16.586 -1.727,21.534 v1(-2.825,22.631)
  Bottom Layer w0.127: U5.4 -3.15,21.847 -3.15,22.025 -2.825,22.35 v1(-2.825,22.631) C12.2
BEAM: U6.4@105.155,12.944
"Beam Sync Demod Out": C14.2@2.794,6.261 R21.1 R23.1 U2.2 | length 13.6
  Top Layer w0.127: v1(1.651,7.493) 2.761,7.493 2.794,7.46 2.794,6.261 2.829,6.226 R21.1
  Bottom Layer w0.127: -4.703,9.935 -4.703,8.636 -3.56,7.493 v1(1.651,7.493) ; U2.2 v1(6.833,21.594)
Beam_In: P3.1 P3.2 R10.2 U5.3 | length 5
  Top Layer w0.127: R10.2 -0.275,29.989 v1(-0.012,30.251)
  Bottom Layer w0.127: U5.3 v1(-4.462,22.025)
  Bottom Layer w0.5: P3.2 P3.1 v1(-0.012,30.251)
Beam_mod: R22.2 U1.3 | length 2
  Top Layer w0.127: R22.2 -0.731,13.551 -0.706,13.576 U1.3
Beam_Out: U6.3@105.155,13.594
"Bottom Forcing Plate Force": R28.2 U9.6
Bottom_Forcing_Plate: P1.2 R14.2@5.075,28.1 R28.1 R31.2 | length 8.5
  Top Layer w0.127: 2.544,24.451 2.544,25.101 5.246,27.803 5.246,30.1 P1.2@4.944,30.401
  Bottom Layer w0.127: v1(5.17,29.362) 5.17,28.185 R14.2@5.271,28.084
CT_CS0: P4.5
DAC_OUT: P4.15 U3.14 U3.19
FB_CS0: U2.10
GND: C2.2@101.945,14.839 C3.1 C5.1 C7.2 C8.2 C9.1 C12.1 C13.1 C14.1 C17.1 P4.1 P4.2 R8.2 R9.2 R10.1 R16.1@-6.35,25.358 R17.1@-4.27,25.358 R18.1@5.075,24.596 R19.1 R20.1@14.939,14.187 R24.1 R25.1 R29.1 R30.1 U1.2 U1.6 U1.7 U1.8 U1.9 U1.10 U2.15 U2.16 U2.21 U2.23 U2.24 U3.12 U3.17 U4.4 U6.2@105.155,14.244 U6.6@105.155,11.644 U6.14 U6.19 U7.4 U8.4 U8.6 U9.4
Guard: P1.3 P3.3 pad.3 R5.2 | length 13.3
  Top Layer w0.127: P1.3@4.163,32.777 P1.3@4.189,32.802
  Top Layer w0.5: v1@-0.056,32.801 v1@-0.095,32.777 ; P1.3@4.163,32.777 v1@-0.095,32.777 ; v1@-0.095,32.777 -4.27,32.777 v1(-0.152,32.741) v1@-0.095,32.777
  Bottom Layer w0.127: R5.2@-5.461,24.299 v1(-5.461,24.892)
NetC2_1: C2.1@-2.529,1.27 U2.19 | length 2.9
  Bottom Layer w0.127: C2.1@-2.529,1.27 -2.103,1.696 -2.103,4.035
NetC2_2: C2.2@-4.329,1.27 U2.20 | length 3.9
  Bottom Layer w0.127: C2.2@-4.329,1.27 -4.329,2.148 -3.937,2.54 -3.048,2.54 -2.753,2.835 -2.753,4.035
NetC6_1: C6.1 R20.2@3.494,13.126 R22.1 U6.6@-2.041,3.751 | length 7.8
  Top Layer w0.127: -0.771,9.401 -0.706,9.466 R22.1 0.344,11.826 0.494,11.976 0.494,12.976 0.594,13.076 C6.1 1.844,13.126 R20.2@3.494,13.126
NetC6_2: C6.2 R20.1@3.494,11.426 R23.2 U6.7@-0.771,3.751 | length 6.7
  Top Layer w0.127: 0.499,9.401 0.524,9.376 R23.2@2.794,9.376 ; R23.2 R23.2@2.794,9.376 ; R20.1@3.494,11.426 3.444,11.476 C6.2 2.159,11.112 2.159,10.012 R23.2@2.794,9.376
NetC10_1: C10.1 R6.1 | length 1.2
  Bottom Layer w0.127: C10.1 -6.45,13.75 R6.1
NetC11_1: C11.1 R5.1 U5.1 U5.2 | length 3.4
  Bottom Layer w0.127: C11.1 -6.68,23.025 -5.75,23.025 -5.75,21.197 U5.1 U5.2
NetC11_2: C11.2 R9.1 U5.5 | length 9.8
  Top Layer w0.127: R9.1 -3.717,18.11 v1(-2.921,18.11)
  Signal Layer 1 w0.254: v1(-6.706,24.257) -6.706,21.895 v1(-2.921,18.11)
  Bottom Layer w0.127: v1(-6.706,24.257) -6.706,23.844 C11.2 ; U5.5@-3.687,18.11 v1(-2.921,18.11)
NetC13_2: C13.2 R7.2 | length 1.1
  Bottom Layer w0.127: R7.2 C13.2@-2.614,13.75
NetC15_1: C15.1 R12.1@82.808,14.187 R13.2@66.527,15.287 R14.2@60.939,15.287 R20.2@14.939,15.287 U8.5
NetC15_2: C15.2 R11.1@94.822,14.187 R12.2@82.808,15.287
NetC16_1: C16.1 R16.2@43.159,15.287 R17.1@37.545,14.187 R18.2@26.369,15.287 R19.2@9.351,15.287 U6.13
NetC16_2: C16.2 R15.1@48.747,14.187 R17.2@37.545,15.287
NetP4_10: P4.10
NetP4_12: P4.12
NetP4_14: P4.14
NetP4_16: P4.16
NetR1_1: R1.1 U7.2
NetR2_1: R2.1 U7.6
NetR2_2: R2.2 U7.7
NetR4_1: R4.1 R6.2 R7.1 U5.7 | length 5
  Bottom Layer w0.127: R4.1@-5.112,16.438 U5.7 ; R6.2 R7.1 R6.2
NetR4_2: R4.2 U5.6 | length 3.3
  Bottom Layer w0.127: U5.6@-4.5,18.273 -4.499,18.235 -4.462,16.612 U5.6
NetR11_2: R11.2@94.822,15.287 U6.18
NetR13_1: R13.1@66.527,14.187 R16.1@43.159,14.187 U7.3
NetR14_1: R14.1@60.939,14.187 R18.1@26.369,14.187 U7.5
NetR15_2: R15.2@48.747,15.287 U8.7
NetR24_2: R24.2 U6.5@-3.311,3.751 | length 2.6
  Top Layer w0.127: R24.2 -2.45,10.821 -2.041,10.411 -2.041,9.401
NetR25_2: R25.2 R26.1 U4.2
NetR27_2: R27.2 U4.6
NetR29_2: R29.2 U3.11 U3.20
NetR30_2: R30.2 R31.1 U9.2
NetU3_13: U3.13 U9.3
NetU3_18: U3.18 U4.3
PLATE_N: R13.2@-3.226,29.938 | length 1.1
  Bottom Layer w0.127: v1(-3.302,31.039) -3.302,30.002 -3.238,29.938 R13.2@-3.226,29.938
PLATE_N_F: P4.20
PLATE_N_S: P4.18
PLATE_P: R12.2@-5.258,29.938 | length 1.3
  Bottom Layer w0.127: v1(-5.309,31.115) -5.309,30.071 -5.216,29.979 -5.175,29.938 R12.2@-5.258,29.938
PLATE_P_F: P4.17
PLATE_P_S: P4.19
PWM2: U6.1@105.155,14.894 U6.11 U6.20
PWM2B_DELAY: P4.8 R11.1@-5.306,15.501 TP1.1
Raw_Beam: C10.2 R8.1 U1.4 | length 4.5
  Top Layer w0.127: U1.4 -0.056,16.454 1.143,17.653 v1(1.905,17.653)
  Bottom Layer w0.127: R8.1 C10.2
S1: R12.1@-5.258,28.838 R16.2@-6.35,26.458 U2.6 | length 3.2
  Bottom Layer w0.127: R16.2@-6.274,26.534 v1(-6.274,27.584) -5.537,27.584 -5.258,27.864 R12.1@-5.258,28.838
S2: R14.1@5.075,27 R18.2@5.075,25.696 U2.3 | length 8.2
  Bottom Layer w0.127: R14.1@5.075,27 5.125,27 5.125,25.696 5.075,25.696 4.385,25.696 4.242,25.552 4.242,21.692 4.989,20.944 U2.3
S3: R13.1@-3.226,28.838 R17.2@-4.27,26.458 U2.5 | length 18.6
  Bottom Layer w0.127: R17.2@-4.27,26.458 0.669,26.458 2.108,25.019 2.108,21.082 3.556,19.634 3.566,19.644 U2.5 ; R17.2@-4.263,26.464 v1(-4.263,27.559) -3.632,27.559 -3.226,27.965 R13.1@-3.226,28.838
S4: R15.1@3.189,26.984 R19.2@3.172,25.696 U2.4 | length 10.4
  Bottom Layer w0.127: R15.1@3.172,27 3.189,26.984 3.189,25.712 3.172,25.696 2.404,25.696 2.404,21.523 3.633,20.294 U2.4
SPI0_MOSI: P4.11
SPI_CS0_POT: U8.1
SPI_MISO: U8.3
SPI_SCLK: U8.2
SPIO_MISO: P4.9 U2.14
SPIO_MOSI: U2.11
SPIO_SCLK: P4.7 U2.13
SSTRB: U2.12
Sync_clk: P4.6 R11.2@-3.606,15.501 U1.1 | length 1.6
  Top Layer w0.127: R11.2@-3.606,15.501 U1.1
Top_Forcing_Plate: P1.1 R15.2@3.189,28.084 R26.2 R27.1 | length 9.8
  Top Layer w0.127: -0.656,24.451 -0.656,25.501 P1.1@3.219,29.376 ; 3.219,28.351 P1.1@3.219,29.376 ; P1.1 P1.1@3.219,29.376 ; P1.1@3.222,29.379 P1.1@3.219,29.376
  Bottom Layer w0.127: R15.2@3.189,28.084 3.239,28.134 v1(3.239,29.362)
ZP: P4.13 U4.7 U9.7
pads on no net: P2.1 P2.2 P2.3 R1.2 U1.11 U1.12 U1.13 U1.14 U1.15 U1.16 U1.17 U1.18 U1.19 U1.20 U2.7 U2.8 U2.9 U3.1 U3.2 U3.3 U3.4 U3.5 U3.6 U3.7 U3.8 U3.9 U3.10 U3.15 U4.1 U4.5 U4.8 U4.9 U6.1@0.499,9.401 U6.2@-0.771,9.401 U6.3@-2.041,9.401 U6.7@105.155,10.994 U6.8@105.155,10.344 U6.9 U6.10 U6.15 U7.1 U9.1 U9.5 U9.8 U9.9
copper on no net: | length 62.7
  Top Layer w0.127: -2.006,21.251 v1(-2.006,23.185) ; -0.706,21.251 -0.706,23.301 -0.656,23.351 ; -0.056,21.251 -0.056,23.185 v1(0.635,23.876) ; 0.594,21.251 0.594,20.035 1.27,19.359 v1(1.894,19.359) ; 2.544,21.251 2.544,23.351 ; 3.844,21.251 3.943,21.35 5.475,21.35 5.044,21.781 v1(5.044,23.241)
  GND w0.254: 6.691,-48.148 9.79,-45.049 ; 24.894,-63.589 26.191,-62.292 26.191,-28.448
  Signal Layer 1 w0.127: v1(-2.006,23.185) v1@5.044,23.185
  other v2: 45.653,7.028 46.753,7.028 62.086,7.714 63.186,7.714 45.653,8.128 46.753,8.128 62.086,8.814 63.186,8.814 45.653,9.228 46.753,9.228 62.086,9.914 63.186,9.914

## Polygon pours and split planes (outlines as drawn)
no net on Top Layer "GND" (solid, shelved, pour order 4): 7.493,34.925 7.493,34.798 7.493,0 5.475,0 5.475,-17.78 -5.588,-17.78 -5.588,0 -7.493,0 -7.493,35.052 7.493,35.052
Guard on Guard (split plane): 6.934,34.486 6.934,0.512 5.494,0.512 5.395,0.502 5.299,0.473 5.211,0.426 5.133,0.362 5.07,0.285 5.023,0.197 4.994,0.101 4.984,0.001 4.984,-17.29 -5.095,-17.29 -5.095,0.001 -5.105,0.101 -5.134,0.197 -5.181,0.285 -5.245,0.362 -5.322,0.426 -5.41,0.473 -5.506,0.502 -5.606,0.512 -7.045,0.512 -7.045,34.486

## Other copper
Guard (plane layer: these items are gaps in the copper):
  lines w0.127: -4.47,22.025 -4.47,24.181 -0.012,28.639 -0.012,30.251 ; 1.651,7.493 1.803,7.645 4.14,7.645 6.833,10.338 6.833,21.594

## Silkscreen, mask and mechanical layers (free items; w line width, h text height)
Top Overlay:
  text "Sense  / Plate" at 1.766,26.518 h0.51
  text "Forcing  / Plate" at -5.969,25.248 h0.51
Bottom Overlay:
  text "Beam" at 2.244,27.401 h0.51

## Dimensions
-5.606,-17.8 to -7.556,0.001 on Mechanical 13
-5.613,-17.805 to 5.486,-17.805 on Mechanical 13
-7.556,0.001 to -7.556,34.996 on Mechanical 13
-7.544,35.001 to 7.442,35.001 on Mechanical 13